# EAGLE board sdls-pan (EAGLE 6.2)
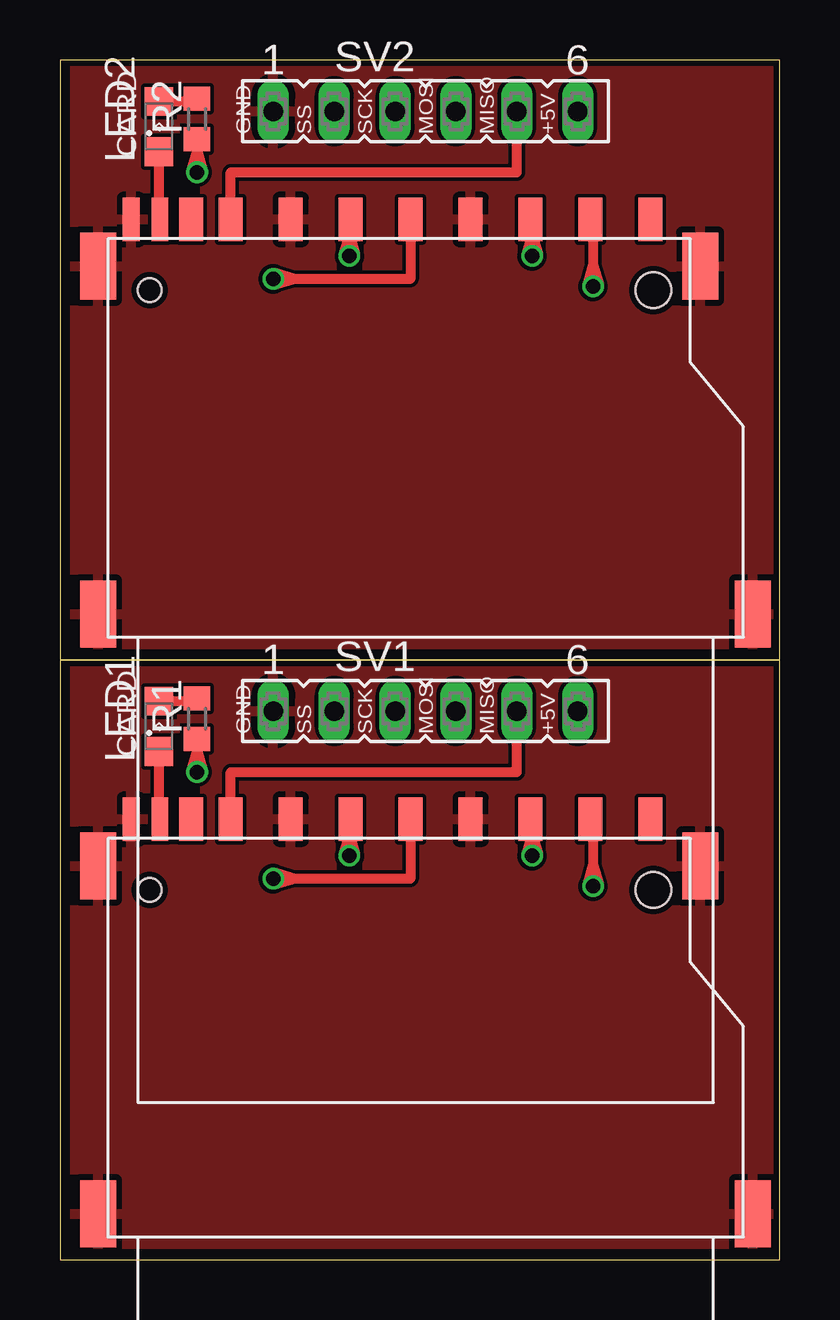
[diagram p0: board, top side]
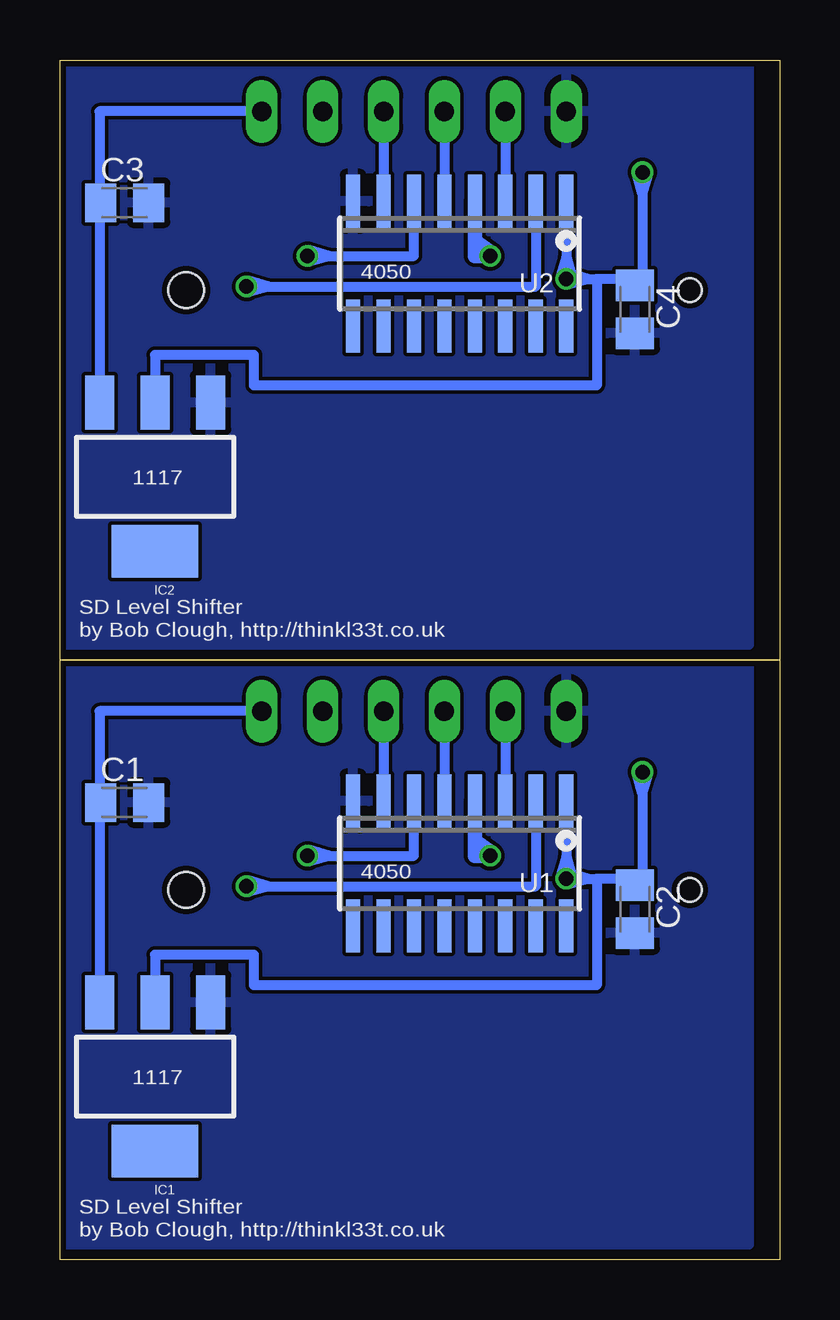
[diagram p1: board, bottom side, seen from below]

Size 30 x 50 mm. Coordinates in mm from the lower left corner, seen from the top.
Outline: 30,25 30,0 0,0 0,25
Outline: 30,25 0,25
Outline: 0,25 30,25
Outline: 30,25 30,50 0,50 0,25
Copper layers (1*16): Top 0.035mm / dielectric 1.5mm / Bottom 0.035mm
Design rules: minimum track width 6mil, minimum drill 12mil, track to track 6mil, track to pad 6mil, pad to pad 6mil, via to via 6mil, smd to smd 0mil, copper to edge 10mil, drill to drill 10mil, minimum pad ring 10mil, minimum via ring 6mil, stop-mask expansion 2mil, vias tented up to drill 100mil, thermal gap 10mil

## Footprints (pad centres in the part's own frame; a part is rotated, then mirrored left to right if it is on the bottom)
C0805K = smd 1.3 x 1.6: 1 -1,0; 2 1,0
SOT223 = smd 1.219 x 2.235: 1 -2.311,-3.099; 2 0,-3.099; 3 2.311,-3.099 | smd 3.6 x 2.2: 4 0,3.099
SML0805 = smd 1.2 x 1.2: A 1.05,0; C -1.05,0
R0603 = smd 1 x 1.1: 1 -0.85,0; 2 0.85,0
FE06 = drill 0.813 long: 1 -6.35,0; 2 -3.81,0; 3 -1.27,0; 4 1.27,0; 5 3.81,0; 6 6.35,0
SOIC16 = smd 0.6 x 2.2: 1 -4.445,-2.6; 2 -3.175,-2.6; 3 -1.905,-2.6; 4 -0.635,-2.6; 5 0.635,-2.6; 6 1.905,-2.6; 7 3.175,-2.6; 8 4.445,-2.6; 9 4.445,2.6; 10 3.175,2.6; 11 1.905,2.6; 12 0.635,2.6; 13 -0.635,2.6; 14 -1.905,2.6; 15 -3.175,2.6; 16 -4.445,2.6
MEM1055 = smd 0.7 x 1.8: CD -11.07,16.45; WP -12.27,16.45 | smd 1 x 1.8: P1 6.88,16.45; P2 4.38,16.45; P3 1.88,16.45; P4 -0.63,16.45; P5 -3.12,16.45; P6 -5.62,16.45; P7 -8.12,16.45; P8 -9.77,16.45; P9 9.38,16.45 | smd 1.5 x 2.8: SHIELD0 -13.65,0; SHIELD1 13.65,0; SHIELD2 -13.65,14.5; SHIELD3 11.45,14.5 | hole 1: -11.5,13.5 | hole 1.5: 9.5,13.5

## Placement (x,y rotation side)
C1  [C0805K]  27.3,19.05 0 bottom
C2  [C0805K]  6.03,14.61 270 bottom
C3  [C0805K]  27.3,44.05 0 bottom
C4  [C0805K]  6.03,39.6 270 bottom
IC1  [SOT223]  26.04,7.62 180 bottom
IC2  [SOT223]  26.04,32.62 180 bottom
LED1  [SML0805]  4.13,22.23 90 top
LED2  [SML0805]  4.13,47.23 90 top
R1  [R0603]  5.71,22.54 90 top
R2  [R0603]  5.71,47.54 90 top
SV1  [FE06]  15.24,22.86 0 top
SV2  [FE06]  15.24,47.86 0 top
U1  [SOIC16]  13.34,16.51 180 bottom
U2  [SOIC16]  13.34,41.51 180 bottom
U$1  SD_CARD  [MEM1055]  15.24,1.91 0 top
U$2  SD_CARD  [MEM1055]  15.24,26.91 0 top

## Library data of the parts
C1-C4 R1 R2 = rcl
IC1 IC2 = SparkFun
LED1 LED2 = led
SV1 SV2 = con-lsta; OC_FARNELL: unknown; OC_NEWARK: unknown
U1 U2 = microbuilder
U$1 U$2 = tbsliver-con-memory

## Nets
+3V1: C4.1 IC2.2 R2.1 U2.1 U$2.P4
+3V3: C2.1 IC1.2 R1.1 U1.1 U$1.P4
+5V: C1.1 IC1.3 SV1.6
+5V1: C3.1 IC2.3 SV2.6
GND: C1.2 C2.2 IC1.1 SV1.1 U1.8 U$1.P3 U$1.P6 U$1.SHIELD0 U$1.SHIELD1 U$1.SHIELD2 U$1.SHIELD3 U$1.WP
GND1: C3.2 C4.2 IC2.1 SV2.1 U2.8 U$2.P3 U$2.P6 U$2.SHIELD0 U$2.SHIELD1 U$2.SHIELD2 U$2.SHIELD3 U$2.WP
MISO: SV1.5 U$1.P7
MISO1: SV2.5 U$2.P7
MOSI: SV1.4 U1.7
MOSI1: SV2.4 U2.7
N$1: LED1.C U$1.CD
N$2: LED1.A R1.2
N$3: LED2.C U$2.CD
N$4: LED2.A R2.2
S_MOSI: U1.6 U$1.P2
S_MOSI1: U2.6 U$2.P2
S_SCK: U1.4 U$1.P5
S_SCK1: U2.4 U$2.P5
S_SS: U1.2 U$1.P1
S_SS1: U2.2 U$2.P1
SCK: SV1.3 U1.5
SCK1: SV2.3 U2.5
SS: SV1.2 U1.3
SS1: SV2.2 U2.3

## Tracks (layer width: path | path; a pad name or v marks a point on that pad's centre or on a via)
+3V1  (via drill 0.6)
  Top 0.406: U$2.P4 14.61,40.88 9.79,40.88 | 9.79,40.88 v8.89,40.88 | R2.1 5.71,46.22 | 5.71,46.22 v5.71,45.32 | 9.79,40.88 8.96,41.11 v8.89,40.88 | 9.79,40.88 8.96,40.64 v8.89,40.88 | 5.71,46.22 5.48,45.39 v5.71,45.32 | 5.71,46.22 5.95,45.39 v5.71,45.32
  Bottom 0.406: U2.1 8.89,41.77 | 8.89,41.77 v8.89,40.88 | v8.89,40.88 7.99,40.88 | 7.99,40.88 7.62,40.88 | 7.62,40.88 7.62,36.43 21.91,36.43 21.91,37.7 26.04,37.7 IC2.2 | v5.71,45.32 5.71,44.42 | 5.71,44.42 5.71,40.88 6.03,40.88 | 6.03,40.88 7.62,40.88 | C4.1 6.03,40.88 | 8.89,41.77 8.65,40.94 v8.89,40.88 | 8.89,41.77 9.13,40.94 v8.89,40.88 | 7.99,40.88 8.82,40.64 v8.89,40.88 | 7.99,40.88 8.82,41.11 v8.89,40.88 | 5.71,44.42 5.95,45.25 v5.71,45.32 | 5.71,44.42 5.48,45.25 v5.71,45.32
+3V3  (via drill 0.6)
  Top 0.406: U$1.P4 14.61,15.88 9.79,15.88 | 9.79,15.88 v8.89,15.88 | R1.1 5.71,21.22 | 5.71,21.22 v5.71,20.32 | 9.79,15.88 8.96,16.11 v8.89,15.88 | 9.79,15.88 8.96,15.64 v8.89,15.88 | 5.71,21.22 5.48,20.39 v5.71,20.32 | 5.71,21.22 5.95,20.39 v5.71,20.32
  Bottom 0.406: U1.1 8.89,16.77 | 8.89,16.77 v8.89,15.88 | v8.89,15.88 7.99,15.88 | 7.99,15.88 7.62,15.88 | 7.62,15.88 7.62,11.43 21.91,11.43 21.91,12.7 26.04,12.7 IC1.2 | v5.71,20.32 5.71,19.42 | 5.71,19.42 5.71,15.88 6.03,15.88 | 6.03,15.88 7.62,15.88 | C2.1 6.03,15.88 | 8.89,16.77 8.65,15.94 v8.89,15.88 | 8.89,16.77 9.13,15.94 v8.89,15.88 | 7.99,15.88 8.82,15.64 v8.89,15.88 | 7.99,15.88 8.82,16.11 v8.89,15.88 | 5.71,19.42 5.95,20.25 v5.71,20.32 | 5.71,19.42 5.48,20.25 v5.71,20.32
+5V
  Bottom 0.406: SV1.6 28.35,22.86 28.35,19.37 28.35,19.05 | 28.35,19.05 IC1.3 | C1.1 28.35,19.05
+5V1
  Bottom 0.406: SV2.6 28.35,47.86 28.35,44.37 28.35,44.05 | 28.35,44.05 IC2.3 | C3.1 28.35,44.05
GND
  pour Top: 0.64,24.77 29.84,24.77 29.84,0.64 0.64,0.64
  pour Bottom: 1.27,24.77 29.84,24.77 29.84,0.64 1.27,0.64
GND1
  pour Top: 0.64,49.77 29.84,49.77 29.84,25.64 0.64,25.64
  pour Bottom: 1.27,49.77 29.84,49.77 29.84,25.64 1.27,25.64
MISO
  Top 0.406: U$1.P7 7.12,20.32 19.05,20.32 SV1.5
MISO1
  Top 0.406: U$2.P7 7.12,45.32 19.05,45.32 SV2.5
MOSI
  Bottom 0.406: SV1.4 U1.7
MOSI1
  Bottom 0.406: SV2.4 U2.7
N$1
  Top 0.406: U$1.CD 4.13,18.36 LED1.C
N$2
  Top 0.406: LED1.A 5.71,23.27 R1.2
N$3
  Top 0.406: U$2.CD 4.13,43.35 LED2.C
N$4
  Top 0.406: LED2.A 5.71,48.27 R2.2
S_MOSI  (via drill 0.6)
  Top 0.406: 19.68,18.36 19.68,17.73 | 19.68,17.73 v19.68,16.83 | 19.68,17.73 19.45,16.9 v19.68,16.83 | 19.68,17.73 19.92,16.9 v19.68,16.83
  Top 0.61: U$1.P2 19.68,18.36
  Bottom 0.406: v19.68,16.83 18.79,16.83 | 18.79,16.83 15.24,16.83 U1.6 | 18.79,16.83 19.62,16.59 v19.68,16.83 | 18.79,16.83 19.62,17.07 v19.68,16.83
S_MOSI1  (via drill 0.6)
  Top 0.406: 19.68,43.35 19.68,42.73 | 19.68,42.73 v19.68,41.83 | 19.68,42.73 19.45,41.9 v19.68,41.83 | 19.68,42.73 19.92,41.9 v19.68,41.83
  Top 0.61: U$2.P2 19.68,43.35
  Bottom 0.406: v19.68,41.83 18.79,41.83 | 18.79,41.83 15.24,41.83 U2.6 | 18.79,41.83 19.62,41.59 v19.68,41.83 | 18.79,41.83 19.62,42.07 v19.68,41.83
S_SCK  (via drill 0.6)
  Top 0.406: 12.06,18.36 12.06,17.73 | 12.06,17.73 v12.06,16.83 | 12.06,17.73 11.83,16.9 v12.06,16.83 | 12.06,17.73 12.3,16.9 v12.06,16.83
  Top 0.61: U$1.P5 12.06,18.36
  Bottom 0.61: v12.06,16.83 12.7,16.83 12.7,17.46 | 12.7,17.46 U1.4 | 12.7,17.46 11.98,16.95 v12.06,16.83 | 12.7,17.46 12.19,16.74 v12.06,16.83
S_SCK1  (via drill 0.6)
  Top 0.406: 12.06,43.35 12.06,42.73 | 12.06,42.73 v12.06,41.83 | 12.06,42.73 11.83,41.9 v12.06,41.83 | 12.06,42.73 12.3,41.9 v12.06,41.83
  Top 0.61: U$2.P5 12.06,43.35
  Bottom 0.61: v12.06,41.83 12.7,41.83 12.7,42.47 | 12.7,42.47 U2.4 | 12.7,42.47 11.98,41.95 v12.06,41.83 | 12.7,42.47 12.19,41.74 v12.06,41.83
S_SS  (via drill 0.6)
  Top 0.406: 22.23,18.36 22.23,16.46 | 22.23,16.46 v22.23,15.56 | 22.23,16.46 21.99,15.63 v22.23,15.56 | 22.23,16.46 22.46,15.63 v22.23,15.56
  Top 0.61: U$1.P1 22.23,18.36
  Bottom 0.406: U1.2 10.16,15.56 21.32,15.56 | v22.23,15.56 21.32,15.56 | 21.32,15.56 22.16,15.32 v22.23,15.56 | 21.32,15.56 22.16,15.8 v22.23,15.56
S_SS1  (via drill 0.6)
  Top 0.406: 22.23,43.35 22.23,41.46 | 22.23,41.46 v22.23,40.56 | 22.23,41.46 21.99,40.63 v22.23,40.56 | 22.23,41.46 22.46,40.63 v22.23,40.56
  Top 0.61: U$2.P1 22.23,43.35
  Bottom 0.406: U2.2 10.16,40.56 21.32,40.56 | v22.23,40.56 21.32,40.56 | 21.32,40.56 22.16,40.32 v22.23,40.56 | 21.32,40.56 22.16,40.8 v22.23,40.56
SCK
  Bottom 0.406: SV1.3 U1.5
SCK1
  Bottom 0.406: SV2.3 U2.5
SS
  Bottom 0.406: SV1.2 U1.3
SS1
  Bottom 0.406: SV2.2 U2.3

## Text on the board
_tsilk: GND | SS | SCK | MOSI | MISO | +5V | CARD | GND | SS | SCK | MOSI | MISO | +5V | CARD
_bsilk: 4050 | 1117 | SD Level Shifter | by Bob Clough, http://thinkl33t.co.uk | 4050 | 1117 | SD Level Shifter | by Bob Clough, http://thinkl33t.co.uk